# Altium PCB PCB1.PcbDoc (part 1 of 3)
Units mil, origin at the board's own origin, x right, y up, seen from the top; angles counter-clockwise.
Board outline 1614.17 x 4106.3 mil, 2 copper layers (Top Layer, Bottom Layer), stack 61.8 mil thick; 17 components, 26 nets, 94 pads, 42 vias.
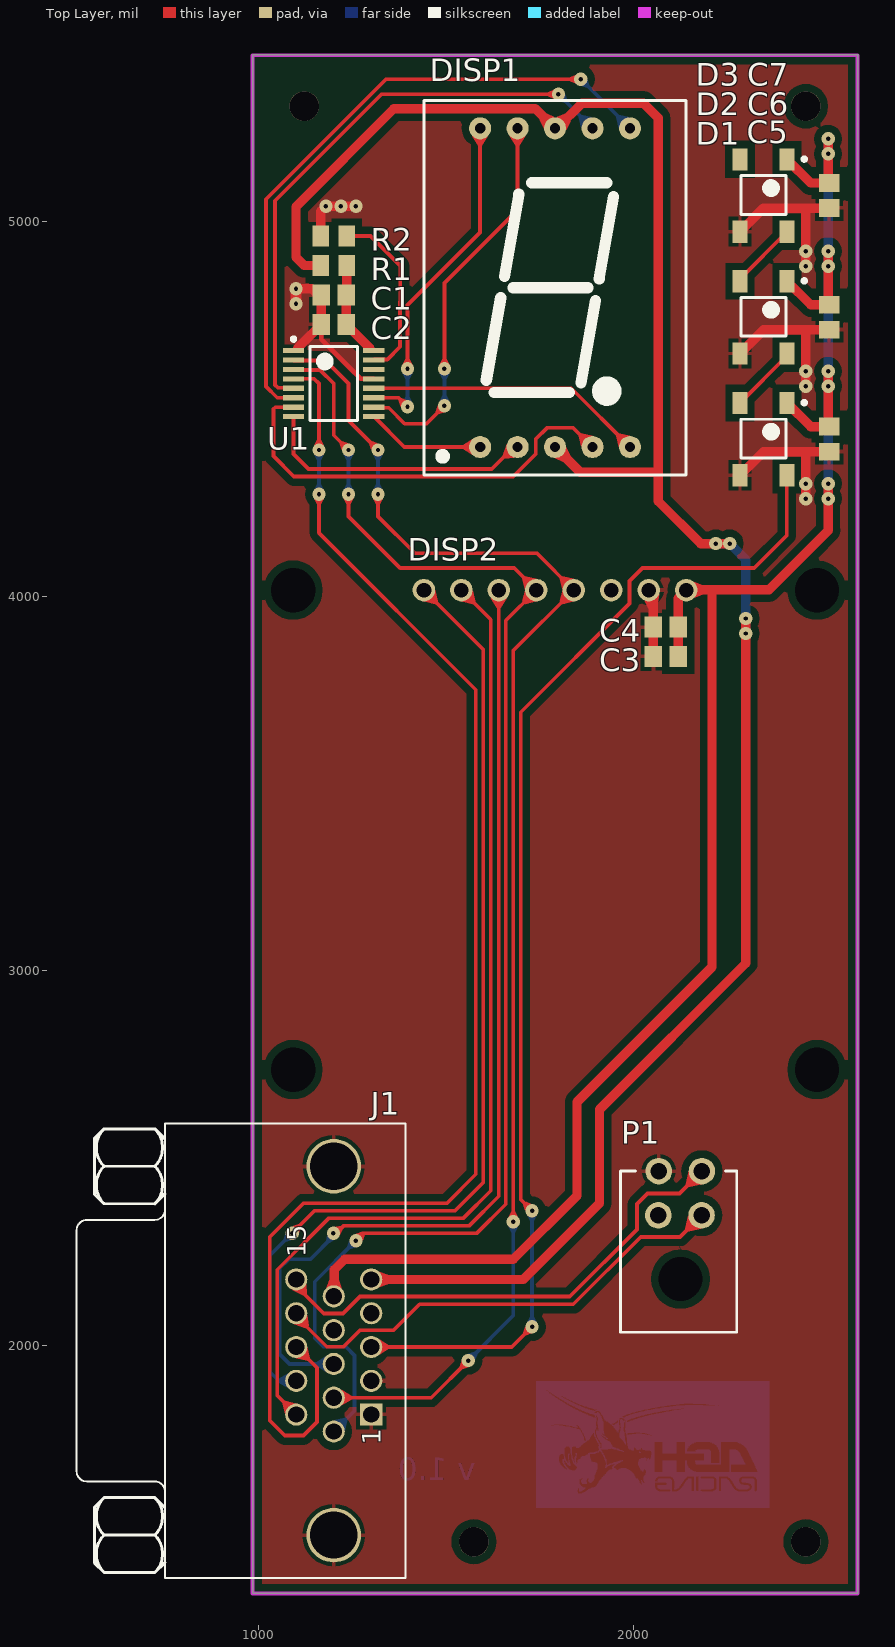
[diagram p0: Top Layer view]
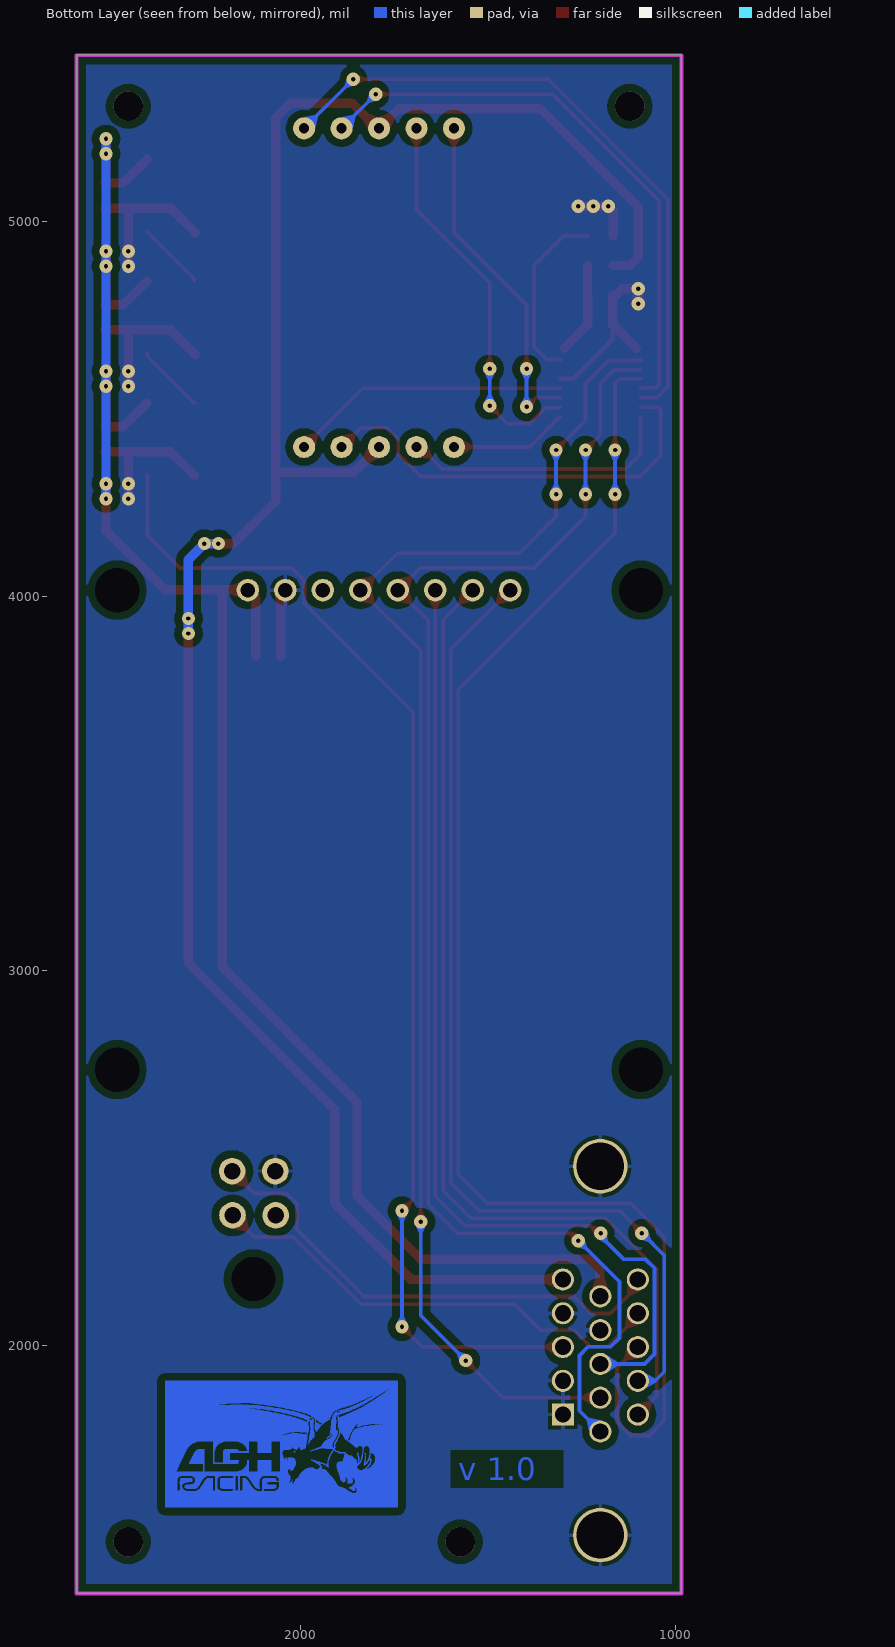
[diagram p1: Bottom Layer view, seen from below]
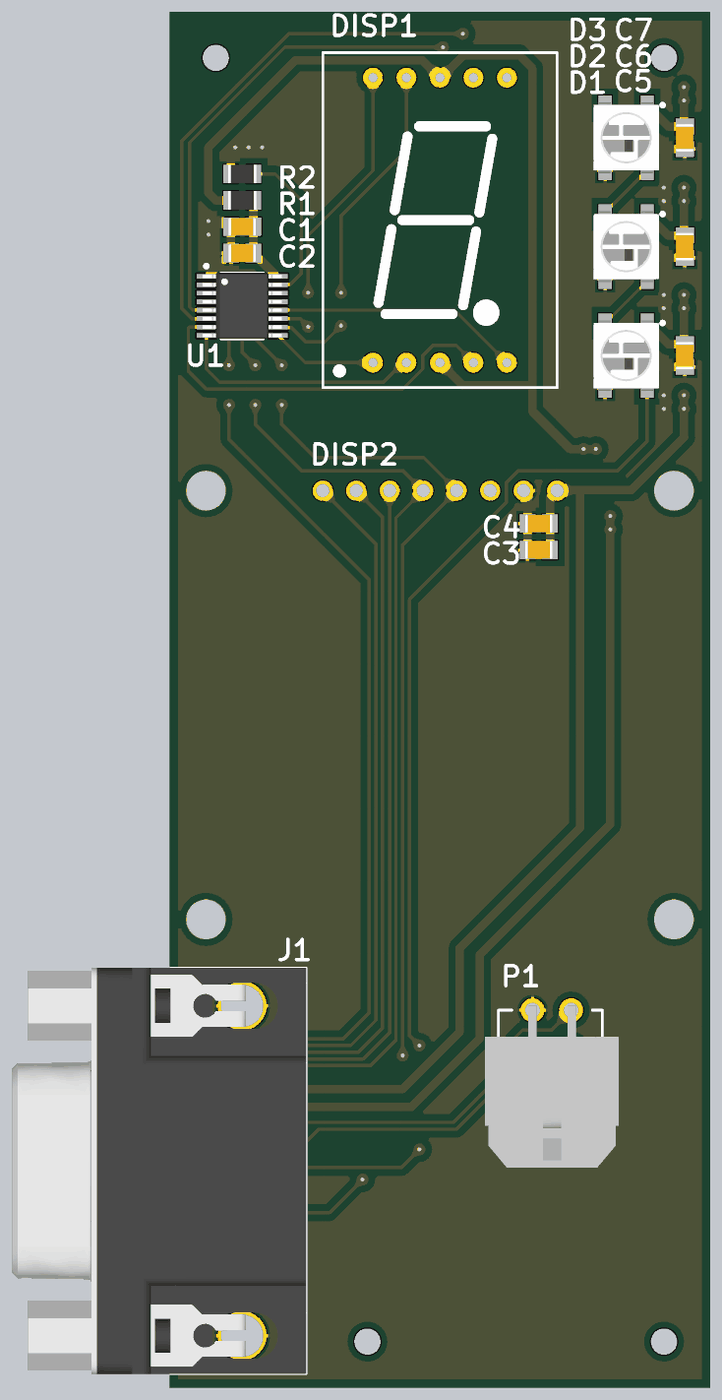
[diagram p4: 3D render of the assembled board from above, using the file's embedded part models]

## Layer stack, top to bottom
Top Solder: solder mask 0.4, Solder Resist, Dk 3.5
Top Layer: signal copper 1.4
Dielectric 1: dielectric 59, FR-4, Dk 4.8
Bottom Layer: signal copper 1.4
Bottom Solder: solder mask 0.4, Solder Resist, Dk 3.5

## Board outline
984.25,1338.58 2598.43,1338.58 2598.43,5444.88 984.25,5444.88

## Design rules (kind name [scope] priority, off if disabled: settings)
Clearance [All] p1: gap=10 except(8: Track-Track SMDPad-SMDPad; 20: Arc-Poly Track-Poly SMDPad-Poly THPad-Poly Via-Poly Fill-Poly Poly-Poly)
PolygonConnect PolygonConnect_1 [IsVia AND InNet('GND')] p1: connectstyle=Direct reliefconductorwidth=10 reliefentries=4 polygonreliefangle="90 Angle" airgapwidth=10
PolygonConnect [All] p2: connectstyle=Relief reliefconductorwidth=10 reliefentries=4 polygonreliefangle="90 Angle" airgapwidth=10
RoomDefinition U_RGB [InComponentClass('U_RGB')] p1: confinementstyle=ConfineIn formatcopy=TRUE lockcomponents=FALSE outline 2579.88,4181.1 2579.88,5322.48 2224.41,5322.48 2224.41,4181.1
RoomDefinition Main [InComponentClass('Main')] p2: confinementstyle=ConfineIn formatcopy=TRUE lockcomponents=FALSE outline 392.91,1368.66 2479.53,1368.66 2479.53,2667.87 392.91,2667.87
RoomDefinition U_GearDisplay [InComponentClass('U_GearDisplay')] p3: confinementstyle=ConfineIn formatcopy=TRUE lockcomponents=FALSE outline 1000,4251.97 2204.72,4251.97 2204.72,5393.7 1000,5393.7
RoomDefinition U_OLED [InComponentClass('U_OLED')] p4: confinementstyle=ConfineIn formatcopy=TRUE lockcomponents=FALSE outline 984.25,2519.68 2598.43,2519.68 2598.43,4173.23 984.25,4173.23
RoutingVias [All] p1: holewidth=28 width=50 viastyle="Through Hole" minholewidth=11.81 minwidth=50 maxholewidth=28 maxwidth=50 useviatemplates=TRUE viatemplateguid#1={8A4ADE7E-71F4-4144-8166-6A4C2B3DD7CA} viatemplateguid#2={3DC784C3-8400-4AAA-83AE-408C54F5F31B} viatemplatename#1=v90h30m0mx0 viatemplatename#2=v170h70
SolderMaskExpansion [All] p1: expansion=4
Width "Schematic Width Constraint_3" [InNet('+3V3')] p1: maxlimit=30 minlimit=20 preferedwidth=25 minimp=50.000000 maximp=50.000000 favimp=50.000000
Width "Schematic Width Constraint" [InNet('GND')] p2: maxlimit=30 minlimit=10 preferedwidth=25 minimp=50.000000 maximp=50.000000 favimp=50.000000
Width "Schematic Width Constraint_2" [InNet('NetC1_2')] p3: maxlimit=30 minlimit=20 preferedwidth=25 minimp=50.000000 maximp=50.000000 favimp=50.000000
Width "Schematic Width Constraint_1" [InNet('+5V')] p4: maxlimit=30 minlimit=20 preferedwidth=25 minimp=50.000000 maximp=50.000000 favimp=50.000000
Width [All] p5: maxlimit=10 minlimit=10 preferedwidth=10
30 further rules are at their usual default settings.

## Components (designator, comment, footprint, x,y, rotation, side; value= is the part's Value field where it differs from the comment)
C1 "Cap" CAP_0805_IPC_MD 1200.79,4803.15 r0 top
C2 "Cap" CAP_0805_IPC_MD 1200.79,4724.41 r0 top
C3 "Cap" CAP_0805_IPC_MD 2086.61,3838.58 r0 top
C4 "Cap" CAP_0805_IPC_MD 2086.61,3917.32 r0 top
C5 "Cap" CAP_0805_IPC_MD 2522.6,4418.74 r90 top
C6 "Cap" CAP_0805_IPC_MD 2522.6,4743.74 r90 top
C7 "Cap" CAP_0805_IPC_MD 2522.6,5068.74 r90 top
D1 "RGB LED" WS2812B 2347.6,4418.74 r270 top
D2 "RGB LED" WS2812B 2347.6,4743.74 r270 top
D3 "RGB LED" WS2812B 2347.6,5068.74 r270 top
DISP1 "7SEG DISP" 7_SEG_LED_0.8_INCH 1791.34,4822.83 r0 top
DISP2 "OLED" OLED_1.3_INCH 1791.34,4015.75 r0 top
J1 "D-SUB 15" Dsub-3H15 1200.79,1986.22 r90 top
P1 "MOLEX-4" MOLEX_4_PIN 2125.2,2321.42 r0 top
R1 "Res" RES_0805_IPC_MD 1200.79,4881.89 r0 top
R2 "Res" RES_0805_IPC_MD 1200.79,4960.63 r180 top
U1 "SCT2167" SSOP_16_IPC_MD 1200.79,4566.93 r0 top

## Footprints (in the part's own frame and the unit in brackets; to place one, negate y for a bottom-side part, rotate by r counter-clockwise, add the part's x,y. Pads: shape width x height; smd on the part's side, far side on the other; paste and mask are expansions set on the pad)
7_SEG_LED_0.8_INCH [mm] "OPTO PLUS LED CORP. OPD-S8023LB-BW"
  round 1.5 hole 0.7: 1(-5.08,-10.8) 2(-2.54,-10.8) 3(0,-10.8) 4(2.54,-10.8) 5(5.08,-10.8) 6(5.08,10.8) 7(2.54,10.8) 8(0,10.8) 9(-2.54,10.8) 10(-5.08,10.8)
  silkscreen extent -8.89,-12.7 8.89,12.7, body extent -10,-13.85 10,13.85, height 12.5
CAP_0805_IPC_MD [mm] "Chip Capacitor, 2-Leads, 0805, SAMSUNG, IPC Medium Density"
  rect 1.2x1.4 smd: 1(-0.85,0) 2(0.85,0)
  body extent -1.05,-0.67 1.05,0.67, height 1.35
Dsub-3H15 [mm] "Dsub 15 pins, right angled"
  rect 1.5x1.5 hole 1.1: 1(-4.33,-2.54)
  round 1.5 hole 1.1: 2(-2.04,-2.54) 3(0.25,-2.54) 4(2.54,-2.54) 5(4.83,-2.54) 6(-5.475,0) 7(-3.185,0) 8(-0.895,0) 9(1.395,0) 10(3.685,0) 11(-4.33,2.54) 12(-2.04,2.54) 13(0.25,2.54) 14(2.54,2.54) 15(4.83,2.54)
  round 3.7 hole 3.2: 16(12.5,0) 17(-12.5,0)
  silkscreen extent -15.4,-4.87 15.4,17.43, body extent -15.4,-4.86 15.4,17.44, height 12.51
MOLEX_4_PIN [mm]
  round 1.8 hole 1.12: 1(1.45,0.66) 2(1.475,3.66) 3(-1.475,0.66) 4(-1.45,3.66)
  round 0 hole 3: ""(0.025,-3.66)
  silkscreen extent -4.04,-7.26 3.84,3.66, body extent -5.05,-8.26 5.1,3.98, height 8.77
OLED_1.3_INCH [mm]
  round 1.524 hole 1: 1(8.89,0) 2(6.35,0) 3(3.81,0) 4(1.27,0) 5(-1.27,0) 6(-3.81,0) 7(-6.35,0) 8(-8.89,0)
  round 0 hole 3: ""(-17.75,-32.5) ""(-17.75,0) ""(17.75,-32.5) ""(17.75,0)
  body extent -20.25,-35 20.25,2.5, height 12.5
RES_0805_IPC_MD [mm] "Chip Resistor, 2-Leads, 0805, Royal Ohm, IPC Medium Density"
  rect 1.1x1.4 smd: 1(-0.875,0) 2(0.875,0)
  body extent -1.07,-0.7 1.08,0.7, height 0.65
SSOP_16_IPC_MD [mm] "SSOP, 16-Leads, Pitch 0,64mm, IPC Medium Density"
  rect 1.45x0.35 smd mask+0.145: 1(-2.725,2.24) 2(-2.725,1.6) 3(-2.725,0.96) 4(-2.725,0.32) 5(-2.725,-0.32) 6(-2.725,-0.96) 7(-2.725,-1.6) 8(-2.725,-2.24) 9(2.725,-2.24) 10(2.725,-1.6) 11(2.725,-0.96) 12(2.725,-0.32) 13(2.725,0.32) 14(2.725,0.96) 15(2.725,1.6) 16(2.725,2.24)
  silkscreen extent -2.85,-2.5 1.6,3.14, body extent -3,-2.5 3,2.5, height 1.75
WS2812B [mm]
  rect 1.5x1 smd: 1(-2.45,1.6) 2(-2.45,-1.6) 3(2.45,-1.6) 4(2.45,1.6)
  silkscreen extent -2.6,-1.52 1.27,2.89, body extent -2.68,-2.48 2.68,2.47, height 1.7

## Part data
C1 C2 C3 C4 C5 C6 C7: "Capacitor"
D1 D2 D3: "Programmable RGB LED"
DISP1: "OPTO PLUS LED CORP. OPD-S8023LB-BW"
J1: "Receptacle Assembly, 15-Pin, Sim Line Connector"
P1: "4 pin socket"
R1 R2: "Resistor"
U1: "Led controller"

## Free pads (board coordinates)
  round 78.74 hole 78.74 unplated: ""(1122.05,5307.09) ""(1574.8,1476.38) ""(2460.63,1476.38) ""(2460.63,5307.09)

## Via types
v1: diameter 35.43/35.43 (per signal layer), hole 11.81, Top Layer to Bottom Layer, tented both sides, 42 vias

## Nets (pads, with @x,y where several pads share a name; then routed paths per layer and width w, separated by ;. In a path a pad name is that pad's centre, name@x,y a point inside that pad or via, vN(x,y) a via of type N, cw(c..) or ccw(c..) an arc to the next point about the centre after c; other vN are vias at no path point)
+3V3: C3.2 C4.2 C5.2 C6.2 C7.2 D1.1 D2.1 D3.1 DISP2.1 J1.10 | length 5101.4
  Top Layer w25: J1.10@1200.79,2131.29 1202.08,2130 1202.08,2202.08 1230,2230 1680,2230 1850,2400 1850,2650 2210,3010 2210,4016.84 ; C3.2@2120.08,3838.58 C4.2@2120.08,3917.32 2120.08,3994.49 DISP2.1@2141.34,4015.75 2142.43,4016.84 2210,4016.84 ; D1.1@2410.59,4515.2 2473.58,4452.2 C5.2@2522.6,4452.2 ; D2.1@2410.59,4840.2 2473.58,4777.2 C6.2@2522.6,4777.2 ; D3.1@2410.59,5165.2 2473.58,5102.2 C7.2@2522.6,5102.2 ; v1(2520,4300) v1(2520,4260) 2520,4176.91 2521.14,4175.77 2362.2,4016.84 2210,4016.84 ; C5.2@2520,4454.8 v1(2520,4560) v1(2520,4600) ; C6.2@2520,4779.8 v1(2520,4880) v1(2520,4920) ; C7.2@2520,5104.8 v1(2520,5180) v1(2520,5220)
  Bottom Layer w20: v1@2520,4298.98 v1(2520,4300)
  Bottom Layer w25: v1(2520,4260) v1@2520,4298.98 ; v1(2520,4300) v1(2520,4560) v1(2520,4600) v1(2520,4880) v1(2520,4920) v1(2520,5180) v1(2520,5220)
+5V: DISP1.3 DISP1.8 J1.5 R1.1 | length 5635.7
  Top Layer w25: R1.1@1166.34,4881.89 1122.05,4881.89 1100,4903.94 1100,5039.06 1361,5300.06 1739,5300.06 DISP1.8@1791.02,5248.03 ; J1.5@1300.79,2176.38 1706.38,2176.38 1910,2380 1910,2630 2300,3020 v1(2300,3900) v1(2300,3940) ; DISP1.8@1780,5248.03 DISP1.8@1791.34,5248.03 1796.15,5248.03 1863.08,5314.96 2027.56,5314.96 2066.93,5275.59 2066.93,4253.07 2180,4140 v1(2220,4140) v1(2257.32,4140) ; DISP1.3@1791.34,4397.64 1858.98,4330 2026.85,4330 2066.93,4330
  Bottom Layer w25: v1(2220,4140) v1(2257.32,4140) 2300,4097.32 v1(2300,3940) v1(2300,3900)
BUT_1: J1.14 P1.1 | length 1268.6
  Top Layer w10: J1.14@1100.79,2086.21 1100.79,2078.16 1182.34,1996.61 1226.61,1996.61 1270.59,2040.59 1360.59,2040.59 1430,2110 1840,2110 2020,2290 2124.88,2290 P1.1@2182.28,2347.4
BUT_2: J1.15 P1.2 | length 1327.2
  Top Layer w10: J1.15@1100.79,2176.37 1100.79,2159.21 1174.34,2085.66 1225.66,2085.66 1270.74,2130.74 1830.74,2130.74 2010,2310 2010,2377.8 2037.95,2405.75 2123.5,2405.75 P1.2@2183.27,2465.51
GDISP_CS: J1.13 U1.4 | length 3851.3
  Top Layer w10: U1.4@1093.5,4579.53 1148.82,4579.53 1161.42,4566.93 v1(1161.41,4389.76) ; J1.13@1099.21,1976.38 J1.13@1099.21,1980.39 ; J1.13@1100.79,1996.06 1156.26,1940.59 1156.26,1796.26 1120,1760 1070,1760 1030,1800 1030,2290 1120,2380 1502.83,2380 1580,2457.17 1580,3750 1161.42,4168.58 v1(1161.42,4271.65)
  Bottom Layer w10: J1.13@1099.68,1996.06 J1.13@1100.79,1996.06 ; v1(1161.42,4271.65) v1(1161.41,4389.76)
GND: C1.1 C2.1 C3.1 C4.1 C5.1 C6.1 C7.1 D1.3 D2.3 D3.3 DISP2.2 J1.1 J1.2 J1.4 J1.9 J1.16 J1.17 P1.4 R2.2 U1.1 U1.13 | length 2091.5
  Top Layer w12: C2.1@1167.32,4724.41 1167.32,4685.44 1272.9,4579.87 1307.73,4579.87 U1.13@1308.07,4579.53
  Top Layer w25: v1(1100,4820) 1142.28,4820 1163.23,4799.06 C1.1@1167.32,4803.15 C2.1@1167.32,4724.41 U1.1@1104.19,4661.28 ; R2.2@1166.34,4960.63 1166.34,5026.34 v1(1180,5040) v1(1260,5040) ; DISP2.2@2041.34,4015.75 2053.15,4003.94 C4.1@2053.15,3917.32 C3.1@2053.15,3838.58 ; D2.3@2281.14,4643.82 D2.3@2284.61,4647.28 2347.6,4710.28 2461.77,4710.28 ; D3.3@2281.14,4968.82 D3.3@2284.61,4972.28 2347.6,5035.28 2461.77,5035.28 ; D1.3@2284.61,4322.28 2347.6,4385.28 2461.77,4385.28 ; v1(2460,4260) 2460,4383.5 2461.77,4385.28 ; v1(2460,4560) 2460,4708.5 2461.77,4710.28 ; v1(2460,4880) 2460,5033.5 2461.77,5035.28 ; C5.1@2522.6,4385.28 2461.77,4385.28 ; C6.1@2522.6,4710.28 2461.77,4710.28 ; C7.1@2522.6,5035.28 2461.77,5035.28
  Top Layer w30: v1(1100,4780) v1(1100,4820)
  other v1: 2460,4300 2460,4600 2460,4920 1220,5040
NetC1_2: C1.2 C2.2 R1.2 U1.16 | length 247.2
  Top Layer w25: R1.2@1235.24,4881.89 1235.24,4804.13 C1.2@1234.25,4803.15 C2.2@1234.25,4724.41 U1.16@1297.38,4661.28
NetD1_2: D1.2 D2.4 | length 184.3
  Top Layer w10: D1.2@2284.61,4515.2 2410.59,4641.18 D2.4@2410.59,4647.28
NetD2_2: D2.2 D3.4 | length 184.3
  Top Layer w10: D2.2@2284.61,4840.2 2284.61,4846.3 D3.4@2410.59,4972.28
NetD3_2: D3.2
NetDISP1_1: DISP1.1 U1.9 | length 316.9
  Top Layer w10: U1.9@1308.07,4478.74 1389.17,4397.64 DISP1.1@1591.34,4397.64
NetDISP1_2: DISP1.2 U1.8 | length 738.4
  Top Layer w10: U1.8@1093.5,4478.74 1093.5,4378.94 1133.39,4339.06 1622.52,4339.06 1681.1,4397.64 DISP1.2@1691.34,4397.64
NetDISP1_4: DISP1.4 U1.7 | length 1153.4
  Top Layer w10: U1.7@1093.5,4503.94 1044.88,4503.94 1040,4499.06 1040,4373.39 1094.33,4319.06 1680,4319.06 1740,4379.06 1740,4419.06 1769.76,4448.82 1840.16,4448.82 DISP1.4@1891.34,4397.64
NetDISP1_5: DISP1.5 U1.12 | length 748.2
  Top Layer w10: U1.12@1308.07,4554.33 1834.65,4554.33 DISP1.5@1991.34,4397.64
NetDISP1_6: DISP1.6 U1.6 | length 1744.1
  Top Layer w10: U1.6@1093.5,4529.13 1049.92,4529.13 1020,4559.06 1020,5059.06 1340,5379.06 v1(1860,5379.06)
  Bottom Layer w10: v1(1860,5379.06) 1860.32,5379.06 DISP1.6@1991.34,5248.03
NetDISP1_7: DISP1.7 U1.5 | length 1547.3
  Top Layer w10: U1.5@1093.5,4554.33 1092.17,4555.67 1051.67,4555.67 1044.14,4563.2 1044.14,5054.91 1328.28,5339.06 v1(1800.32,5339.06)
  Bottom Layer w10: v1(1800.32,5339.06) DISP1.7@1891.34,5248.03
NetDISP1_9: DISP1.9 U1.10 | length 1047.1
  Top Layer w10: U1.10@1308.07,4503.94 1309.41,4502.6 1347.4,4502.6 1390,4460 1448.19,4460 v1(1496.06,4507.87) ; v1(1496.06,4606.3) 1496.06,4835.12 1691.34,5030.39 DISP1.9@1691.34,5248.03
  Bottom Layer w10: v1(1496.06,4507.87) v1(1496.06,4606.3)
NetDISP1_10: DISP1.10 U1.11 | length 923.1
  Top Layer w10: U1.11@1308.07,4529.13 1373.31,4529.13 v1(1397.64,4504.8) ; v1(1397.64,4606.3) 1397.64,4776.69 1591.34,4970.39 DISP1.10@1591.34,5248.03
  Bottom Layer w10: v1(1397.64,4504.8) v1(1397.64,4606.3)
NetR2_1: R2.1 U1.15 | length 476.4
  Top Layer w10: R2.1@1235.24,4960.63 1299.21,4960.63 1377.95,4881.89 1377.95,4785.29 1377.64,4784.98 1377.64,4665.04 1343.86,4631.26 1309.41,4631.26 U1.15@1308.07,4629.92
NetU1_14: U1.14
OLED_CS: DISP2.6 J1.8 | length 2670.8
  Top Layer w10: v1(1200,2300) 1207.95,2300 1227.95,2320 1562.83,2320 1641.34,2398.5 DISP2.6@1641.34,4015.75
  Bottom Layer w10: v1(1200,2300) 1200,2292.05 1137.95,2230 1080,2230 1056.26,2206.26 1056.26,1977.62 1082.9,1950.98 J1.8@1200.79,1950.98
OLED_DC: DISP2.7 J1.11 | length 2699.9
  Top Layer w10: J1.11@1100.79,1815.74 1050,1866.53 1050,2202.05 1187.95,2340 1546.8,2340 1620,2413.2 1620,3937.09 DISP2.7@1541.34,4015.75
OLED_MOSI: DISP2.4 J1.7 U1.2 | length 3736.2
  Top Layer w10: U1.2@1093.5,4629.92 1094.84,4628.58 1178.5,4628.58 1240.16,4566.93 1240.16,4468.5 v1(1318.9,4389.76) ; J1.7@1200.79,1860.82 1460.82,1860.82 v1(1560,1960) ; v1(1318.9,4271.65) 1318.9,4212.6 1417.32,4114.17 1742.91,4114.17 DISP2.4@1841.34,4015.75 1680,3854.41 v1(1680,2330)
  Bottom Layer w10: v1(1318.9,4271.65) v1(1318.9,4389.76) ; v1(1560,1960) 1680,2080 v1(1680,2330)
OLED_RST: DISP2.8 J1.12 | length 2687.9
  Top Layer w10: v1(1090,2300) 1150,2360 1524.82,2360 1600,2435.18 1600,3857.09 DISP2.8@1441.34,4015.75
  Bottom Layer w10: v1(1090,2300) 1030,2240 1030,1930 1054.1,1905.9 J1.12@1100.79,1905.9
OLED_SCK: DISP2.5 J1.6 U1.3 | length 3845.9
  Top Layer w10: U1.3@1093.5,4604.72 1094.84,4603.39 1164.33,4603.39 1200.79,4566.93 1200.79,4429.13 v1(1240.16,4389.76) ; v1(1240.16,4271.65) 1240.16,4212.6 1377.95,4074.8 1682.28,4074.8 DISP2.5@1741.34,4015.75 1660,3934.41 1660,2377.17 1582.83,2300 1280,2300 v1(1260,2280)
  Bottom Layer w10: J1.6@1200.79,1770.66 1256.26,1826.14 1256.26,1973.74 1233.39,1996.61 1173.39,1996.61 1150,2020 1150,2170 v1(1260,2280) ; v1(1240.16,4271.65) v1(1240.16,4389.76)
RGB: D1.4 J1.3 | length 3233
  Top Layer w10: J1.3@1299.21,1976.38 J1.3@1318.9,1996.06 ; J1.3@1300.79,1996.06 J1.3@1318.9,1996.06 ; v1(1730,2050) 1676.06,1996.06 J1.3@1318.9,1996.06 ; v1(1730,2360) 1700,2390 1700,3690 1990,3980 1990,4040 2024.8,4074.8 2322.83,4074.8 2409.45,4161.42 2409.45,4321.14 D1.4@2410.59,4322.28
  Bottom Layer w10: v1(1730,2050) v1(1730,2360)
pads on no net: DISP2. DISP2.3 P1. P1.3
copper on no net: | length 166906